# EAGLE board Iridium_9603_Beacon (EAGLE 7.6.0)
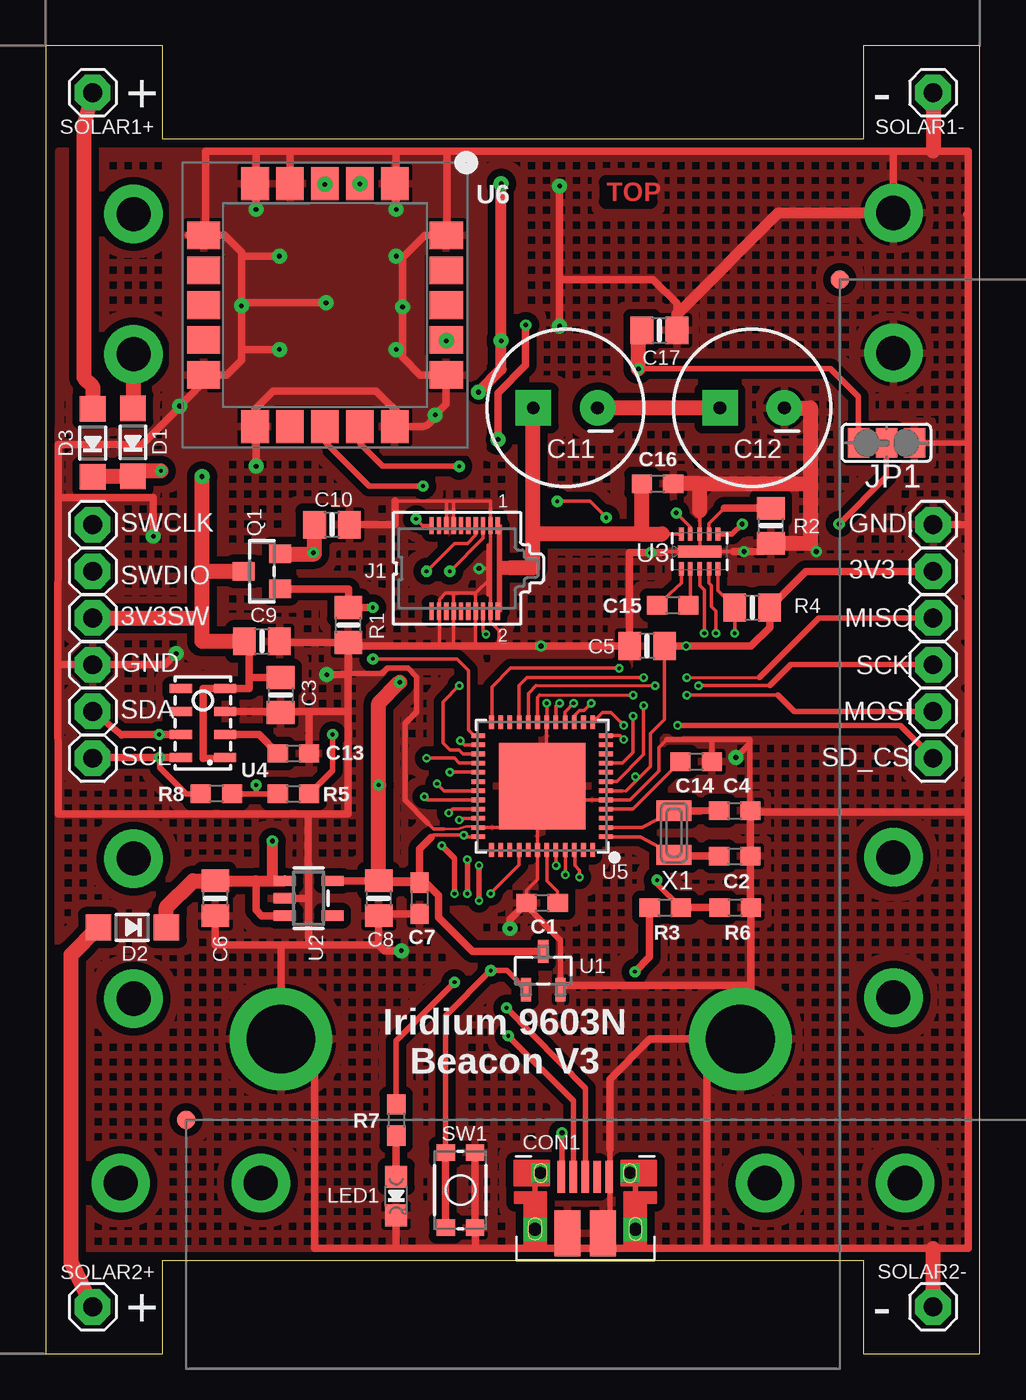
[diagram p0: board, top side]
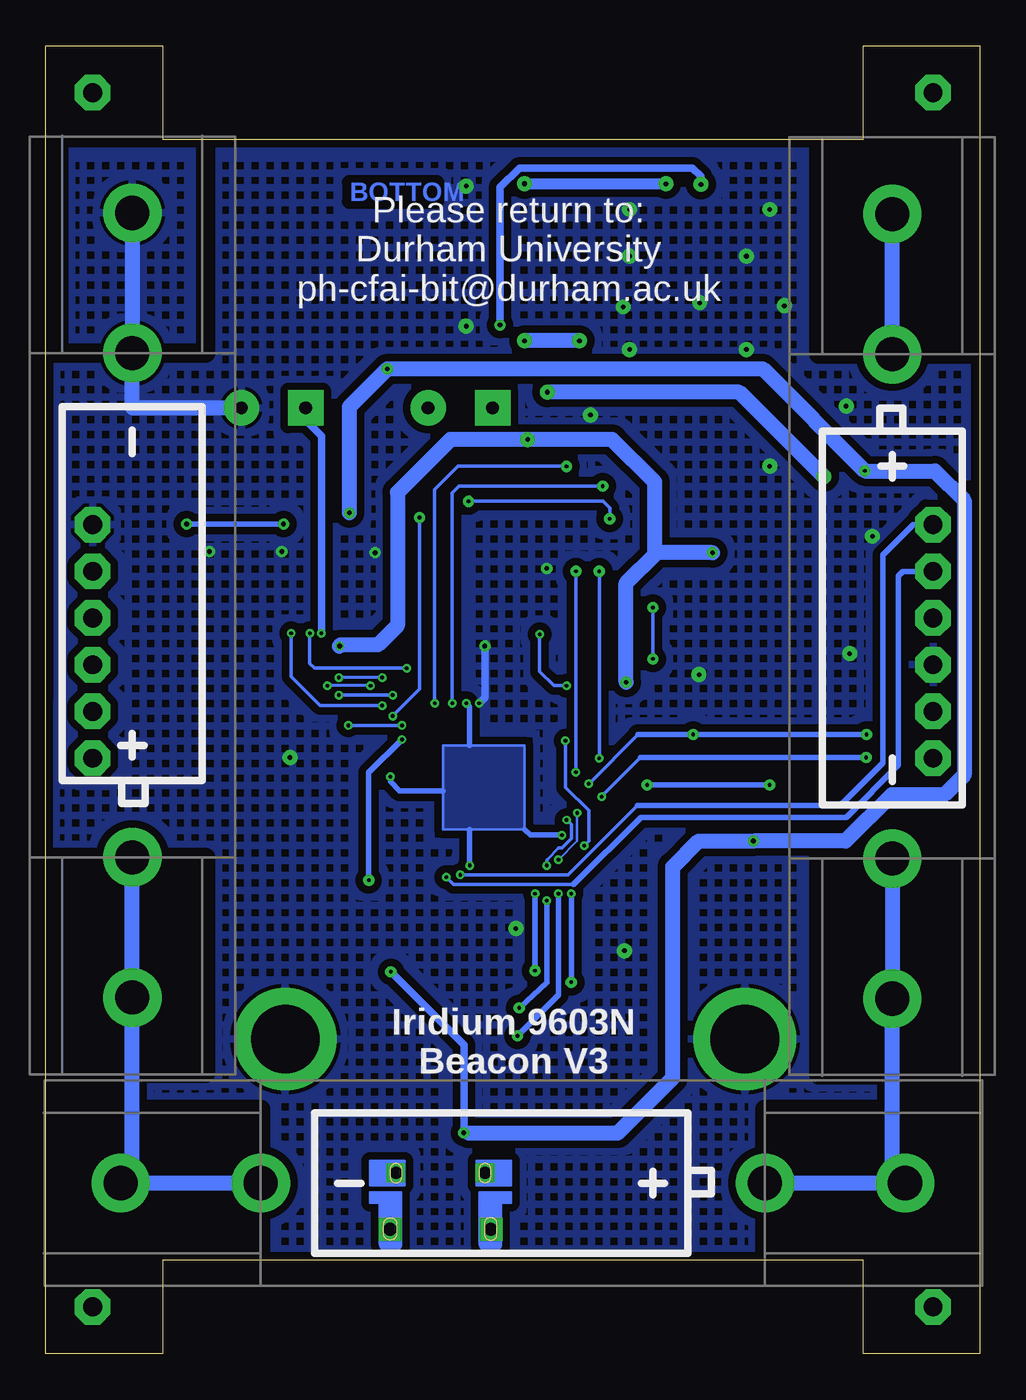
[diagram p1: board, bottom side, seen from below]

Size 50.8 x 71.12 mm. Coordinates in mm from the lower left corner, seen from the top.
Outline: 0,0 6.35,0 6.35,5.08 44.45,5.08 44.45,0 50.8,0 50.8,71.12 44.45,71.12 44.45,66.04 6.35,66.04 6.35,71.12 0,71.12 0,0
Copper layers (1*16): Top 0.018mm / dielectric 1.55mm / Bottom 0.018mm
Design rules "Multi-CB_2L_125um-Tracks_OL35um": minimum track width 0.125mm, minimum drill 0.2mm, track to track 0.125mm, track to pad 0.125mm, pad to pad 0.125mm, via to via 0.125mm, smd to smd 0mil, copper to edge 0.2mm, drill to drill 0.2mm, minimum pad ring 0.125mm, minimum via ring 0.125mm, stop-mask expansion 2mil, vias tented up to drill 0.45mm, thermal gap 0.2mm

## Footprints (pad centres in the part's own frame; a part is rotated, then mirrored left to right if it is on the bottom)
1X01 = drill 1.016 pad 1.93 octagon: 1 0,0
BATTERY-AAA-KEYSTONE82 = drill 1.854 pad 3.175: GND@1 21.336,0; GND@2 13.716,0; PWR@1 -21.336,0; PWR@2 -13.716,0
0603-NO = smd 1.1 x 1: 1 -0.85,0; 2 0.85,0
0805-NO = smd 1.24 x 1.5: 1 -0.95,0; 2 0.95,0
CPOL-RADIAL-1F-2.7V = drill 0.7 pad 1.93 square: + 1.75,0 | drill 0.7 pad 1.93: - -1.75,0
FCI_10103594 = smd 1.425 x 2.5: BASE@1 -0.963,1.45; BASE@2 0.963,1.45 | smd 0.4 x 1.75: D+ 0,4.525; D- -0.65,4.525; GND 1.3,4.525; ID 0.65,4.525; VBUS -1.3,4.525 | drill 0.7 pad 1.25 square: SPRT@1 -2.736,1.679; SPRT@2 2.736,1.679 | drill 0.65 pad 1.016 square: SPRT@3 -2.426,4.747; SPRT@4 2.426,4.747
SOD-123 = smd 1.4 x 1.4: A 1.85,0; C -1.85,0
FIDUCIAL-1X2 = smd 1 x 1: 1 0,0
SS4-10-3.50-X-D = smd 0.23 x 0.93: 1 1.8,2.335; 2 1.8,-2.335; 3 1.4,2.335; 4 1.4,-2.335; 5 1,2.335; 6 1,-2.335; 7 0.6,2.335; 8 0.6,-2.335; 9 0.2,2.335; 10 0.2,-2.335; 11 -0.2,2.335; 12 -0.2,-2.335; 13 -0.6,2.335; 14 -0.6,-2.335; 15 -1,2.335; 16 -1,-2.335; 17 -1.4,2.335; 18 -1.4,-2.335; 19 -1.8,2.335; 20 -1.8,-2.335
PAD-JUMPER-3-2OF3_NC_BY_TRACE_YES_SILK_LARGE = smd 1.168 x 1.6: 1 -1.524,0; 2 0,0; 3 1.524,0
CHIPLED_0805_NOOUTLINE = smd 1.2 x 1.2: A 0,-1.05; C 0,1.05
SOT23-WIDE = smd 1 x 1.2: 1 -0.95,-1; 2 0.95,-1; 3 0,1
STANDOFF-ELECTRICAL-MCMASTER-95117A411 = drill 3.734 pad 5.588: P1 0,0
TACTILE_SWITCH_SMD_4.6X2.8MM = smd 0.9 x 1: 1 -2.05,-0.8; 2 2.05,-0.8; 3 2.05,0.8; 4 -2.05,0.8
SOT95P237X112-3N = smd 0.559 x 1.27: 1 -0.94,-1.041; 2 0.94,-1.041; 3 0,1.041
SOT23-5 = smd 0.55 x 1.2: 1 -0.95,-1.3; 2 0,-1.3; 3 0.95,-1.3; 4 0.95,1.3; 5 -0.95,1.3
DFN300X200-10L = smd 0.711 x 0.254: 1 -0.94,0.991; 2 -0.94,0.508; 3 -0.94,0; 4 -0.94,-0.508; 5 -0.94,-0.991; 6 0.94,-0.991; 7 0.94,-0.508; 8 0.94,0; 9 0.94,0.508; 10 0.94,0.991 | smd 0.635 x 2.388: 11 0,0
LGA8 = smd 1.2 x 0.5: 1 -1.2,1.875; 2 -1.2,0.625; 3 -1.2,-0.625; 4 -1.2,-1.875; 5 1.2,-1.875; 6 1.2,-0.625; 7 1.2,0.625; 8 1.2,1.875
TQFN48_7MM = smd 0.25 x 0.75: 1 -2.75,-3.475; 2 -2.25,-3.475; 3 -1.75,-3.475; 4 -1.25,-3.475; 5 -0.75,-3.475; 6 -0.25,-3.475; 7 0.25,-3.475; 8 0.75,-3.475; 9 1.25,-3.475; 10 1.75,-3.475; 11 2.25,-3.475; 12 2.75,-3.475; 25 2.75,3.475; 26 2.25,3.475; 27 1.75,3.475; 28 1.25,3.475; 29 0.75,3.475; 30 0.25,3.475; 31 -0.25,3.475; 32 -0.75,3.475; 33 -1.25,3.475; 34 -1.75,3.475; 35 -2.25,3.475; 36 -2.75,3.475 | smd 0.75 x 0.25: 13 3.475,-2.75; 14 3.475,-2.25; 15 3.475,-1.75; 16 3.475,-1.25; 17 3.475,-0.75; 18 3.475,-0.25; 19 3.475,0.25; 20 3.475,0.75; 21 3.475,1.25; 22 3.475,1.75; 23 3.475,2.25; 24 3.475,2.75; 37 -3.475,2.75; 38 -3.475,2.25; 39 -3.475,1.75; 40 -3.475,1.25; 41 -3.475,0.75; 42 -3.475,0.25; 43 -3.475,-0.25; 44 -3.475,-0.75; 45 -3.475,-1.25; 46 -3.475,-1.75; 47 -3.475,-2.25; 48 -3.475,-2.75 | smd 4.7 x 4.7: THERMAL 0,0
SAM-M8Q = smd 1.8 x 1.5: 1 -6.6,3.8; 2 -6.6,1.9; 3 -6.6,0; 4 -6.6,-1.9; 5 -6.6,-3.8; 11 6.6,-3.8; 12 6.6,-1.9; 13 6.6,0; 14 6.6,1.9; 15 6.6,3.8 | smd 1.5 x 1.8: 6 -3.8,-6.6; 7 -1.9,-6.6; 8 0,-6.6; 9 1.9,-6.6; 10 3.8,-6.6; 16 3.8,6.6; 17 1.9,6.6; 18 0,6.6; 19 -1.9,6.6; 20 -3.8,6.6
XTAL3215 = smd 1.1 x 1.9: P$1 1.2,0; P$2 -1.2,0

## Placement (x,y rotation side)
3V3  [1X01]  48.26,42.55 0 top
3V3SW  [1X01]  2.54,40.01 0 top
BAT1  [BATTERY-AAA-KEYSTONE82]  4.76,40.64 270 bottom
BAT2  [BATTERY-AAA-KEYSTONE82]  25.4,9.27 180 bottom
BAT3  [BATTERY-AAA-KEYSTONE82]  46.1,40.7 90 bottom
C1  1uF  [0603-NO]  26.99,24.51 180 top
C2  22pF  [0603-NO]  37.47,27.05 0 top
C3  10uF  [0805-NO]  12.76,35.81 270 top
C4  22pF  [0603-NO]  37.47,29.53 0 top
C5  10uF  [0805-NO]  32.7,38.48 180 top
C6  10µF  [0805-NO]  9.21,24.77 270 top
C7  1uF  [0603-NO]  20.32,24.77 270 top
C8  10µF  [0805-NO]  18.1,24.77 270 top
C9  0.1uF  [0805-NO]  11.75,38.73 0 top
C10  10uF  [0805-NO]  15.56,45.09 0 top
C11  1F 2.7V  [CPOL-RADIAL-1F-2.7V]  28.26,51.44 180 top
C12  1F 2.7V  [CPOL-RADIAL-1F-2.7V]  38.42,51.44 180 top
C13  0.1uF  [0603-NO]  13.46,32.64 0 top
C14  1uF  [0603-NO]  35.37,32.19 0 top
C15  1uF  [0603-NO]  34.1,40.7 0 top
C16  0.22uF  [0603-NO]  33.27,47.31 0 top
C17  2.2uF  [0805-NO]  33.37,55.66 0 top
CON1  [FCI_10103594]  29.34,5.08 0 top
D1  MBR120  [SOD-123]  4.73,49.56 90 top
D2  MBR120  [SOD-123]  4.7,23.18 180 top
D3  MBR120  [SOD-123]  2.54,49.53 90 top
FD1  FIDUCIAL1X2  [FIDUCIAL-1X2]  7.62,12.7 0 top
FD2  FIDUCIAL1X2  [FIDUCIAL-1X2]  43.18,58.42 0 top
GND  [1X01]  2.54,37.47 0 top
GND.  [1X01]  48.26,45.09 0 top
J1  SS4-10-3.50-X-D  [SS4-10-3.50-X-D]  22.78,42.71 0 top
JP1  [PAD-JUMPER-3-2OF3_NC_BY_TRACE_YES_SILK_LARGE]  45.72,49.53 180 top
LED1  RED  [CHIPLED_0805_NOOUTLINE]  19.05,8.57 180 top
MISO  [1X01]  48.26,40.01 0 top
MOSI  [1X01]  48.26,34.92 0 top
Q1  DMG3415U-7  [SOT23-WIDE]  11.75,42.55 90 top
R1  100K  [0805-NO]  16.45,39.62 90 top
R2  30K  [0805-NO]  39.43,45.02 90 top
R3  100k  [0603-NO]  33.69,24.26 0 top
R4  100K  [0805-NO]  38.42,40.58 0 top
R5  1K  [0603-NO]  13.46,30.45 0 top
R6  100K  [0603-NO]  37.5,24.26 0 top
R7  2.2K  [0603-NO]  19.05,12.7 270 top
R8  1K  [0603-NO]  9.27,30.45 180 top
S1  STANDOFF_ELECTRICALMCMASTER-95117A411  [STANDOFF-ELECTRICAL-MCMASTER-95117A411]  12.78,17.1 0 top
S2  STANDOFF_ELECTRICALMCMASTER-95117A411  [STANDOFF-ELECTRICAL-MCMASTER-95117A411]  37.78,17.1 0 top
SCK  [1X01]  48.26,37.47 0 top
SCL  [1X01]  2.54,32.38 0 top
SD_CS  [1X01]  48.26,32.38 0 top
SDA  [1X01]  2.54,34.92 0 top
SOLAR1+  [1X01]  2.54,68.58 0 top
SOLAR1-  [1X01]  48.26,68.58 0 top
SOLAR2+  [1X01]  2.54,2.54 0 top
SOLAR2-  [1X01]  48.26,2.54 0 top
SW1  [TACTILE_SWITCH_SMD_4.6X2.8MM]  22.54,8.89 270 top
SWCLK  [1X01]  2.54,45.09 0 top
SWDIO  [1X01]  2.54,42.55 0 top
U1  MCP111T-195I/TT  [SOT95P237X112-3N]  27.05,20.83 0 top
U2  SPX3819-3.3  [SOT23-5]  14.29,24.77 270 top
U3  LTC3225EDDB#TRMPBF  [DFN300X200-10L]  35.56,43.62 90 top
U4  MPL3115A2LGA8  [LGA8]  8.54,34.29 180 top
U5  ATSAMD21G18_QFN  [TQFN48_7MM]  26.99,30.86 90 top
U6  SAM-M8Q  [SAM-M8Q]  15.18,57.02 270 top
X1  32.768  [XTAL3215]  34.16,28.32 270 top

## Library data of the parts
3V3 3V3SW GND GND. MISO MOSI SCK SCL SD_CS SDA SOLAR1+ SOLAR1- SOLAR2+ SOLAR2- SWCLK SWDIO = adafruit
BAT1-BAT3 S1 S2 = SparkFun-Electromechanical
C1-C10 C13-C17 CON1 D1-D3 LED1 Q1 R1-R8 U2 U5 = microbuilder
C11 C12 = SparkFun-Capacitors
FD1 FD2 = SparkFun-Aesthetics
J1 = SS4-10-3.50-X-D
JP1 = SparkFun-Passives
SW1 = SparkFun-Electromechanical; PROD_ID: SWCH-13065
U1 = Microchip-MCP11; MPN: MCP111T-270E/TT; OC_FARNELL: 1851877; OC_NEWARK: 56J7328; PACKAGE: SOT23-3; SUPPLIER: MICROCHIP
U3 = LTC_By_element14_Batch_1
U4 = SparkFun-Sensors
U6 = ubloxLib
X1 = adafruit2

## Nets
3V3SW: 3V3SW.1 C3.1 C9.1 Q1.3 U4.1 U4.4 U6.2 U6.17
!RESET: SW1.1 SW1.2 U1.1 U5.40
+3V3: 3V3.1 C5.1 C7.1 C8.1 C10.1 Q1.2 R4.2 R5.1 R8.1 U1.3 U2.5 U5.6 U5.17 U5.36 U5.44 U6.3
A0: U5.3
A1: R4.1 U3.5 U5.7
A2: U5.8
A3: J1.19 U5.9
A4: U5.10
A5: U5.47
AREF: C14.1 U5.4
D0: U5.16 U6.13
D1: U5.15 U6.14
D2: U5.23
D3: U5.14
D5: U3.4 U5.24
D6: J1.5 U5.29
D7: U5.30
D8: U5.11
D9: R3.2 R6.1 U5.12
D10: J1.6 U5.27
D11: Q1.1 R1.2 U5.25
D12: J1.7 U5.28
D13: R7.1 U5.26
D+: CON1.D+ U5.34
D-: CON1.D- U5.33
GND: BAT3.GND@1 BAT3.GND@2 C1.2 C2.2 C3.2 C4.2 C5.2 C6.2 C7.2 C8.2 C9.2 C10.2 C12.- C13.2 C14.2 C16.2 C17.2 CON1.BASE@1 CON1.BASE@2 CON1.GND CON1.SPRT@1 CON1.SPRT@2 CON1.SPRT@3 CON1.SPRT@4 GND.1 GND..1 J1.3 J1.4 J1.8 J1.13 J1.14 J1.15 J1.18 JP1.1 LED1.C R1.1 R2.1 R6.2 S1.P1 S2.P1 SOLAR1-.1 SOLAR2-.1 SW1.3 SW1.4 U1.2 U2.2 U3.8 U3.11 U4.3 U5.5 U5.18 U5.35 U5.42 U5.THERMAL U6.1 U6.4 U6.5 U6.6 U6.10 U6.11 U6.15 U6.16 U6.20
LTC3225_VOUT: C11.+ C16.1 J1.1 J1.2 U3.10
MISO: MISO.1 U5.21
MOSI: MOSI.1 U5.19
N$1: BAT2.GND@1 BAT2.GND@2 BAT3.PWR@1 BAT3.PWR@2
N$2: LED1.A R7.2
N$3: BAT1.GND@1 BAT1.GND@2 BAT2.PWR@1 BAT2.PWR@2
N$4: D3.A SOLAR1+.1
N$5: C2.1 U5.1 X1.P$1
N$6: C11.- C12.+ U3.3
N$7: C4.1 U5.2 X1.P$2
N$9: C15.2 U3.2
N$10: C15.1 U3.1
N$11: R2.2 U3.7
N$12: C13.1 U4.2
N$13: JP1.2 U3.6
N$14: D2.A SOLAR2+.1
SCK: SCK.1 U5.20
SCL: R8.2 SCL.1 U4.8 U5.32
SD_CS: SD_CS.1 U5.13
SDA: R5.2 SDA.1 U4.7 U5.31
SWCLK: SWCLK.1 U5.45
SWDIO: SWDIO.1 U5.46
VBAT: BAT1.PWR@1 BAT1.PWR@2 D1.A
VBUS: C6.1 C17.1 CON1.VBUS D1.C D2.C D3.C JP1.3 R3.1 U2.1 U2.3 U3.9
VDDCORE1: C1.1 U5.43

## Tracks (layer width: path | path; a pad name or v marks a point on that pad's centre or on a via)
3V3SW  (via drill 0.25 pad 0.81)
  Top 0.406: U4.1 8.54,32.35 8.54,36.16 U4.4 11.04,36.16 11.04,36.76 | C9.1 11.04,38.73 11.04,36.76 | C3.1 11.04,36.76
  Top 0.61: v23.53,52.29 24.77,53.53 v24.77,55.09 v24.77,63.63
  Top 0.813: C9.1 8.49,38.73 8.49,40.01 | 8.49,40.01 8.49,42.55 | Q1.3 8.49,42.55 | 3V3SW.1 8.49,40.01 | 8.49,42.55 v8.49,47.7 | U6.2 17.05,63.6 | v21.78,55.09 U6.17
  Bottom 0.61: v24.76,63.62 U6.2
  Bottom 0.813: v8.49,47.7 13.08,52.29 v23.53,52.29 | v24.77,63.63 v24.76,63.62 | v21.78,55.09 v24.77,55.09
  other vias: 17.08,63.62
!RESET  (via drill 0.2 pad 0.46, 0.2 pad 0.61)
  Top 0.203: U5.40 25.74,26.56 v24.19,25.02
  Top 0.305: SW1.1 21.74,18.38 v24.19,20.83 25.07,20.83 U1.1
  Top 0.406: SW1.1 SW1.2
  Bottom 0.305: v24.19,20.83 v24.19,25.02
+3V3  (via drill 0.2 pad 0.41, 0.2 pad 0.46, 0.2 pad 0.61, 0.25 pad 0.41, 0.25 pad 0.61, 0.25 pad 0.81)
  Top 0.127: U5.6 31.56,30.61 | U5.36 23.47,28.07 | U5.44 27.75,27.37 | 20.95,28.07 21.08,28.19
  Top 0.203: 32.07,31.11 32.89,31.94 32.89,33.72 33.66,34.48 C5.1 | U5.6 31.37,30.61 | v32.07,31.37 32.07,31.11 | 32.07,31.11 31.56,30.61 | U5.17 27.74,35.23 v27.94,35.37 | 27.75,27.37 v27.75,26.54 | 21.08,28.19 v22.73,28.19 22.82,28.11 U5.36
  Top 0.305: R5.1 R8.1 11.43,30.45 v11.43,30.92
  Top 0.406: 20.95,28.07 20.32,27.43 C7.1 18.1,25.61 C8.1 U2.5 20.58,25.71 21.37,24.92 21.37,23.72 23.22,21.87 U1.3 | 3V3.1 41.34,42.55 R4.2 39.37,39.49 38.35,38.48 v34.83,38.48 | 34.77,38.48 C5.1 | v24.59,49.72 24.59,52.25 26.1,53.75 v26.1,55.94 | v15.18,63.59 U6.3
  Top 0.813: Q1.2 14.61,43.49 | 14.61,43.49 C10.1 | C8.1 v18.1,30.92 18.1,35.37 v19.24,36.51 | 14.61,43.49 v14.54,43.56
  Bottom 0.127: 27.74,33.08 24.77,33.08 24.77,28.51 27.75,28.51 29.21,28.51 29.21,30.61 29.21,33.08 27.75,33.08 27.74,33.08 | 27.74,33.08 U5.17
  Bottom 0.305: 29.21,30.61 31.56,30.61 32.07,31.11 v32.07,31.37 | v27.75,26.54 27.75,28.51 | 24.77,28.51 24.45,28.19 v22.73,28.19 | v27.94,35.37 27.75,35.18 27.75,33.08 | v11.43,30.92 v18.1,30.92
  Bottom 0.406: v26.1,55.94 26.1,63.44 25.05,64.48 15.62,64.48 15.18,64.04 v15.18,63.59
  Bottom 0.813: v19.24,36.51 19.24,41.91 17.65,43.5 | v14.54,43.56 17.59,43.56 17.65,43.5 | 17.65,43.5 17.68,43.53 17.68,47.4 20,49.72 v24.59,49.72 28.8,49.72 31.69,46.83 31.69,39.59 32.73,38.54 34.77,38.54 v34.83,38.48
  pour Bottom: 24.77,33.08 29.21,33.08 29.21,28.51 24.77,28.51
A1  (via drill 0.2 pad 0.46)
  Top 0.127: R4.1
  Top 0.203: U3.5 36.55,41.49 R4.1 | U5.7 31.05,31.11 32.51,32.58 v32.51,35.24 | v37.47,39.18 R4.1
  Bottom 0.203: v32.51,35.24 35.88,35.24 37.47,36.83 v37.47,39.18
A3  (via drill 0.2 pad 0.46, 0.2 pad 0.61)
  Top 0.127: 30.48,32.13 U5.9
  Top 0.203: J1.19 20.49,45.04 v20.13,45.4 | v27.81,46.35 29.59,46.35 v30.48,45.47 | 30.48,32.13 31.37,32.13 31.94,32.7 v31.94,34.67
  Bottom 0.203: v20.13,45.4 20.13,45.97 20.51,46.35 v27.81,46.35 | v30.48,45.47 30.48,36.13 v31.94,34.67
AREF
  Top 0.203: U5.4 31.94,29.61 C14.1
D0  (via drill 0.2 pad 0.46, 0.2 pad 0.61)
  Top 0.203: v28.7,35.37 28.24,34.91 U5.16
  Top 0.305: v20.51,47.18 17.59,47.18 15.24,49.53 15.24,50.36 U6.13
  Bottom 0.203: v28.7,35.37 28.7,46.8 28.32,47.18 v20.51,47.18
D1  (via drill 0.2 pad 0.46, 0.2 pad 0.61)
  Top 0.127: 28.74,34.71 U5.15
  Top 0.203: v29.65,35.37 29.27,34.99 29.02,34.99 28.74,34.71
  Top 0.305: v22.48,48.26 18.32,48.26 17.08,49.5 U6.14
  Bottom 0.203: v29.65,35.37 29.65,46.99 28.38,48.26 v22.48,48.26
D5  (via drill 0.2 pad 0.46)
  Top 0.127: 24.26,34.35 U5.24
  Top 0.203: U3.4 36.07,41.91 36.2,41.78 36.2,40.64 36.45,40.39 v36.45,39.18 | 24.26,34.35 24.26,36.26 25.27,37.27 v31.18,37.27
  Bottom 0.203: v36.45,39.18 36.45,37.53 36.2,37.27 v31.18,37.27
D6  (via drill 0.2 pad 0.46, 0.2 pad 0.61)
  Top 0.127: 23.5,31.62 U5.29
  Top 0.203: J1.5 23.78,44.35 v21.97,42.55 | v21.97,31.62 23.5,31.62
  Bottom 0.203: v21.97,42.55 v21.97,31.62
D9  (via drill 0.2 pad 0.46, 0.2 pad 0.61)
  Top 0.203: U5.12 31.22,33.61 v31.43,33.4
  Top 0.305: R3.2 33.24,25.55 v33.24,25.75
  Top 0.406: R3.2 R6.1
  Bottom 0.305: v33.24,25.75 33.24,31.59 v31.43,33.4
D10  (via drill 0.2 pad 0.46)
  Top 0.127: 22.35,36.2 v22.48,36.32
  Top 0.203: U5.27 22.7,32.61 22.48,32.83 21.97,32.83 21.59,33.21 21.59,35.43 v22.48,36.32 | J1.6 23.78,39.28 v23.94,39.12
  Bottom 0.203: v22.48,36.32 23.18,36.32 23.94,37.08 v23.94,39.12
D11  (via drill 0.2 pad 0.61)
  Top 0.127: U5.25 23.29,33.61
  Top 0.203: 23.29,33.61 22.99,33.91 22.99,37.15 22.35,37.78 v17.78,37.78
  Top 0.406: Q1.1 16.45,41.59 R1.2 | R1.2 v17.78,40.58 | R1.2
  Bottom 0.203: v17.78,37.78 v17.78,40.58
D12  (via drill 0.2 pad 0.46, 0.2 pad 0.61)
  Top 0.127: 23.49,32.13 U5.28
  Top 0.203: v20.7,42.55 22.23,44.07 22.92,44.07 23.38,44.52 J1.7 | v20.7,32.38 22.23,32.38 22.48,32.13 23.49,32.13
  Bottom 0.203: v20.7,42.55 v20.7,32.38
D13  (via drill 0.2 pad 0.46, 0.2 pad 0.61)
  Top 0.203: v22.54,33.34 22.77,33.11 U5.26
  Top 0.305: v22.23,25.02 22.23,26.92 v21.53,27.62 | R7.1 19.05,17.02 v22.23,20.19
  Bottom 0.203: v22.54,33.34 22.54,30.8 21.27,29.53 21.27,27.88 v21.53,27.62
  Bottom 0.305: v22.23,20.19 v22.23,25.02
D+  (via drill 0.2 pad 0.46, 0.2 pad 0.61)
  Top 0.203: U5.34 22.57,29.11 v22.48,29.02
  Top 0.305: v23.56,26.54 v23.56,24.64 | CON1.D+ 29.34,14.41 v25.05,18.8
  Bottom 0.152: 22.92,27.5 23.56,26.86
  Bottom 0.203: v22.48,29.02 22.23,28.77 22.23,28 22.73,27.5 22.92,27.5 | 23.56,26.86 v23.56,26.54
  Bottom 0.305: v25.05,18.8 23.56,20.19 v23.56,24.64
D-  (via drill 0.2 pad 0.46, 0.2 pad 0.61)
  Top 0.203: U5.33 22.12,29.61 v21.91,29.4
  Top 0.305: v22.92,26.86 v22.92,25.02 | CON1.D- 28.69,13.73 v25.15,17.27
  Bottom 0.127: v21.91,29.4 21.91,27.88 v22.92,26.86
  Bottom 0.305: v22.92,25.02 22.92,19.49 v25.15,17.27
GND  (via drill 0.2 pad 0.46, 0.25 pad 0.61, 0.25 pad 0.81)
  Top 0.127: U5.THERMAL 24.74,28.61 | U5.THERMAL 26.74,30.61 | U5.THERMAL 27.74,30.11 | U5.THERMAL 27.24,31.11 | J1.4 24.19,40.37 | U5.18 | R1.1 17.02,38.67 16.38,38.48 | 12.7,38.67 C9.2 | U5.42 | C4.2 38.29,29.53 | J1.15 | J1.18 21.4,40.37 | J1.8 23.37,40.37 | 33.66,43.62 33.66,43.56 | 21.65,28.54 22.42,28.54 22.86,28.67 23.45,28.67 U5.35
  Top 0.203: 24.74,28.61 U5.35 | 26.74,30.61 U5.42 | 27.74,30.11 U5.5 31.76,30.11 33.34,31.69 33.34,32.96 33.78,33.4 | 27.24,31.11 U5.18 | 24.18,42.16 J1.4 24.18,42.7 v23.56,42.7 | 24.18,42.16 J1.3 24.19,45.04 | C1.2 26.14,25.18 26.73,25.78 U5.42 | J1.15 21.78,46.35 | 21.78,46.35 18.99,46.35 | 24.19,45.04 24.19,46.35 22.1,46.35 | 22.1,46.35 21.78,46.35 | 21.4,38.48 21.4,40.37 21.4,41.02 21.74,41.36 23.38,41.36 | U3.11 U3.8 35.56,45.85 | U3.11 37.4,43.62 | U3.11 33.66,43.62 | J1.8 23.38,41.36 | 23.38,41.36 24.18,42.16 | U5.18 v27.24,35.37 | 23.37,40.37 23.37,38.48 23.37,38.42 | 22.16,38.48 22.16,40.35 J1.14 22.16,40.39 22.16,41.34 | J1.13 22.18,46.27 22.1,46.35 | 21.65,28.54 21.08,28.54 20.77,28.86 | 24.19,45.04 24.19,43.97 24.04,43.97 24.04,41.24 24.19,41.24 24.19,39.78 24.64,39.34 24.64,38.54 24.67,38.51
  Top 0.305: 36.22,33.4 C14.2 | 38.29,29.53 38.29,33.18 | 36.22,33.4 38.29,33.4 38.29,33.18 | 33.78,33.4 36.22,33.4 | 30.67,11.11 30.67,9.64 CON1.GND 30.67,9.61 30.67,7.18 30.3,7.18 CON1.BASE@2 | CON1.SPRT@3 26.6,9.83 CON1.SPRT@1 26.67,6.76 26.67,5.71 | CON1.SPRT@4 32.07,9.83 CON1.SPRT@2 31.75,6.76 31.75,5.71 | 20.77,28.86 19.53,30.1 19.53,34.26 20.16,34.89 20.16,36.8 19.68,37.27 18.57,37.27 18.29,36.99 16.45,36.99 16.51,37.05 16.51,38.54 | 26.05,24.42 27.99,22.48 U1.2 | JP1.1 50.16,49.53 | 38.29,33.18 v37.53,32.42
  Top 0.406: 11.43,65.41 8.7,65.41 8.7,60.82 U6.6 | 11.43,65.41 13.27,65.41 | 13.27,65.41 19.05,65.41 | 19.05,65.41 21.81,65.41 | 21.81,65.41 46.1,65.41 | 46.1,65.41 48.26,65.41 50.16,65.41 50.16,62.04 | 50.16,62.04 50.16,49.53 50.16,45.09 | 50.16,45.09 50.16,29.46 | 50.16,29.46 50.16,5.71 48.26,5.71 35.94,5.71 | 0.66,46.55 0.67,49.44 5.24,49.44 7.3,51.5 | 0.66,46.55 0.64,37.47 | 0.64,37.47 0.67,29.34 14.26,29.34 | 19.05,5.71 14.61,5.71 14.61,17.1 S1.P1 12.78,22.23 | 19.05,5.71 23.37,5.71 | 23.37,5.71 26.67,5.71 31.75,5.71 35.94,5.71 | LED1.C 19.05,5.71 | S2.P1 32.85,17.1 30.67,14.92 30.67,11.11 | U2.2 14.29,24.77 | 14.29,24.77 14.29,22.23 | 14.29,22.23 12.78,22.23 | 12.78,22.23 9.21,22.23 C6.2 | C7.2 18.1,23.91 C8.2 18.1,22.23 | 18.1,22.23 14.29,22.23 | GND..1 50.16,45.09 | 0.64,37.47 GND.1 6.48,37.47 v7.08,38.07 | 16.38,38.48 21.4,38.48 22.16,38.48 23.37,38.48 v26.92,38.48 | 12.7,38.67 R1.1 16.45,36.99 | C9.2 12.76,38.73 | C10.2 18.99,45.09 18.99,46.35 | C5.2 v26.92,38.48 | C5.2 v26.92,38.48 | 37.4,43.62 v37.97,43.62 38.99,43.62 R2.1 | 33.66,43.56 v32.89,43.56 31.75,43.56 C5.2 | 50.1,61.98 50.16,62.04 | 26.05,24.42 C1.2 25.24,23.61 v25.24,23.11 | SW1.4 SW1.3 23.37,6.81 23.37,5.71 | S2.P1 35.94,17.1 35.94,5.71 | S2.P1 38.35,17.68 38.35,20.03 | 50.16,29.46 38.38,29.46 C4.2 C2.2 38.31,24.34 38.1,24.13 | 14.29,24.77 14.29,26.64 | 16.45,34.91 16.45,29.34 14.26,29.34 | 16.45,34.91 16.45,36.99 | v41.91,43.62 41.91,43.72 41.53,44.1 | U4.3 12.76,34.91 | 12.76,34.91 C3.2 | 12.76,34.91 14.31,34.91 | 14.31,34.91 C13.2 | 14.31,34.91 16.45,34.91 | BAT3.GND@1 46.1,65.41 | 38.35,20.03 R6.2 | 38.35,20.03 28.23,20.03 27.94,20.32 | 19.05,65.41 19.05,63.62 U6.1 19.05,63.55 v19.05,62.23
  Top 0.406: 11.43,65.41 11.43,63.62 U6.5 11.43,63.57 v11.43,62.23 | U6.4 13.27,65.41 | 10.64,54.61 10.64,54.04 9.82,53.22 U6.10 8.58,52.84 v7.27,51.53 | 10.64,54.61 v10.64,56.99 | v10.64,56.99 10.64,59.69 | 10.64,59.69 10.64,59.91 9.73,60.82 U6.6 | 21.81,65.41 21.81,60.86 U6.20 20.62,60.82 19.4,59.59 | U6.15 19.49,50.42 | 19.49,50.42 20.52,50.42 arc60 v21.18,51.05 21.78,51.65 U6.16 20.36,53.22 19.4,54.2 19.4,54.61 | 19.49,50.42 19.49,50.83 17.97,52.36 12.35,52.36 11.38,51.38 U6.11 11.43,50.37 v11.43,48.26 | 19.4,54.61 v19.4,56.93 19.4,59.59 | 8.64,23.81 8.89,24.07 8.89,24.13 | 14.26,29.34 14.26,26.54 | v19.34,21.91 18.41,21.91 18.1,22.23 | v15.27,36.92 16.38,36.92 16.45,36.99 | v5.84,44.45 5.84,46.55 0.66,46.55 | v27.94,63.5 27.94,58.42 | 27.94,58.42 v27.94,55.88 | C17.2 34.32,57.12 33.02,58.42 27.94,58.42 | U6.6 7.74,60.82 | v19.05,54.61 19.4,54.61 | v12.7,54.61 10.64,54.61 | v12.7,59.69 10.64,59.69 | v19.05,59.69 19.4,59.69 19.4,59.59 | v15.24,57.15 10.64,57.15 v10.64,56.99
  Top 0.61: BAT3.GND@1 39.85,62.04 34.32,56.51 C17.2
  Top 0.813: 35.56,45.85 35.56,47.31 | 35.56,47.31 C16.2 | C12.- 41.59,51.44 41.59,44.07 R2.1 | 35.56,47.31 41.53,47.31 | SOLAR1-.1 48.26,65.41 | SOLAR2-.1 48.26,5.71
  Bottom 0.406: v27.24,35.37 26.92,35.69 v26.92,38.48
  Bottom 0.813: C12.- 46.1,51.44 BAT3.GND@2 BAT3.GND@1
  pour Bottom (isolate 0.406, rank 2, hatched): 0.64,5.71 0.7,65.41 50.16,65.41 50.23,5.71
  pour Top (isolate 0.406, rank 2, hatched): 0.64,5.71 0.7,65.41 50.16,65.41 50.16,5.71
  pour Top (isolate 0.254): 6.89,65.37 23.78,65.37 23.78,49.02 6.89,49.02
LTC3225_VOUT
  Top 0.127: 24.58,42.74 J1.2 24.7,40.37 24.7,42.61 | 24.58,42.74 J1.1 24.77,45.04 24.77,43.05 | 25.27,42.74 24.58,42.74 | 24.7,42.61 24.7,42.95 | 24.7,42.95 24.7,45.02 24.57,45.02 | 24.77,42.42 24.77,40.39 24.64,40.39 | 24.77,42.86 25.08,42.86 | 24.77,42.86 24.77,43.05 | 24.77,43.05 25.27,43.05 | 24.7,42.95 25.08,42.95 25.08,42.93 | 24.77,42.86 24.77,42.42 | 24.77,42.42 25.34,42.42 | 24.89,42.61 25.15,42.61 | 24.7,42.61 24.89,42.61 | 24.89,42.61 24.89,42.48 | 33.53,44.58 33.54,44.56
  Top 0.203: 33.54,44.56 U3.10
  Top 0.813: C11.+ 26.48,51.44 26.48,44.56 | 26.48,44.56 26.48,42.74 25.27,42.74 | 32.42,44.56 C16.1 | 32.42,44.56 26.48,44.56 | 32.42,44.56 32.44,44.58 33.53,44.58
MISO  (via drill 0.2 pad 0.46)
  Top 0.152: v34.86,36.77 38.8,36.77
  Top 0.203: U5.21 25.74,36.34 26.16,36.77 v32.51,36.77
  Top 0.305: 38.8,36.77 42.04,40.01 MISO.1
  Bottom 0.152: v32.51,36.77 v34.86,36.77
MOSI  (via drill 0.2 pad 0.46)
  Top 0.127: U5.19
  Top 0.152: 26.86,35.81 v31.94,35.81
  Top 0.203: U5.19 26.73,35.69 26.86,35.81 | v34.86,35.81 39.81,35.81
  Top 0.305: 39.81,35.81 40.7,34.92 MOSI.1
  Bottom 0.203: v31.94,35.81 v34.86,35.81
N$1
  Bottom 0.813: BAT2.GND@2 BAT2.GND@1 46.1,9.27 BAT3.PWR@1 BAT3.PWR@2
N$2
  Top 0.406: R7.2 LED1.A
N$3
  Bottom 0.813: BAT2.PWR@1 4.76,9.27 | 4.76,9.27 BAT1.GND@1 BAT1.GND@2 | 4.76,9.27 BAT2.PWR@2
N$4
  Top 0.813: SOLAR1+.1 2.06,66.83 2.06,53.09 2.54,52.61 D3.A
N$5
  Top 0.203: U5.1 32.35,28.11 X1.P$1
  Top 0.406: X1.P$1 33.47,27.12 33.47,27.05 C2.1
N$6  (via drill 0.2 pad 0.46)
  Top 0.203: U3.3 35.56,41.78 35.81,41.53 v35.81,39.18
  Top 0.813: C12.+ C11.-
  Bottom 0.406: v35.81,39.18 35.81,49.91 36.67,50.76 C12.+
N$7
  Top 0.203: U5.2 32.43,28.61 X1.P$2
  Top 0.406: X1.P$2 35.6,29.52 C4.1
N$9
  Top 0.127: 35.05,40.73 C15.2
  Top 0.203: U3.2 35.05,40.73
N$10
  Top 0.203: U3.1 34.57,41.9 C15.1
N$11
  Top 0.203: U3.7 36.07,45.15 36.89,45.97
  Top 0.406: 36.89,45.97 R2.2
N$12
  Top 0.406: U4.2 11.59,33.66 C13.1
N$13  (via drill 0.25 pad 0.61)
  Top 0.305: U3.6 37.33,44.56 v37.88,45.12 | v43.15,45.12 45.72,47.69 JP1.2
  Bottom 0.305: v37.88,45.12 v43.15,45.12
N$14
  Top 0.813: SOLAR2+.1 1.36,4.99 1.36,21.69 D2.A
SCK  (via drill 0.2 pad 0.46)
  Top 0.152: 26.67,36.32 v33.15,36.32
  Top 0.203: U5.20 26.24,35.89 26.67,36.32 | v35.5,36.32 39.37,36.32
  Top 0.305: 39.37,36.32 40.51,37.47 SCK.1
  Bottom 0.152: v33.15,36.32 v35.5,36.32
SCL  (via drill 0.2 pad 0.46, 0.2 pad 0.61)
  Top 0.203: U5.32 20.75,30.11 v20.57,30.29
  Top 0.305: R8.2 7.62,30.45 6.19,31.88 v6.19,32.41
  Top 0.406: U4.8 v6.19,32.41 2.54,32.41 SCL.1
  Bottom 0.203: v20.57,30.29 18.45,32.41
  Bottom 0.305: 18.45,32.41 v6.19,32.41
SD_CS  (via drill 0.2 pad 0.46)
  Top 0.203: U5.13 30.26,34.86 30.73,34.86 v31.43,34.16
  Top 0.305: v34.35,34.16 46.48,34.16 SD_CS.1
  Bottom 0.203: v31.43,34.16 v34.35,34.16
SDA  (via drill 0.2 pad 0.46, 0.2 pad 0.61)
  Top 0.203: U5.31 21.65,30.61 v21.27,30.99
  Top 0.305: R5.2 15.59,31.73 v15.59,33.66
  Top 0.406: U4.7 v6.16,33.66 4.13,33.66 SDA.1
  Bottom 0.203: v21.27,30.99 18.6,33.66
  Bottom 0.305: 18.6,33.66 v15.59,33.66 v6.16,33.66
SWCLK  (via drill 0.2 pad 0.46)
  Top 0.127: 28.26,27.37 U5.45
  Top 0.203: v28.26,26.04 28.26,27.37
  Bottom 0.203: 18.64,29.81 22.42,26.04 v28.26,26.04
  Bottom 0.305: SWCLK.1 3.62,45.09 5.27,43.43 5.27,32.13 7.59,29.81 18.64,29.81
SWDIO  (via drill 0.2 pad 0.46)
  Top 0.127: 28.77,27.36 U5.46
  Top 0.203: v29.02,25.91 29.02,26.29 28.77,26.54 28.77,27.36
  Bottom 0.203: 22.1,25.53 28.64,25.53 v29.02,25.91
  Bottom 0.305: SWDIO.1 4.19,42.55 4.45,42.29 4.45,32 7.27,29.15 18.45,29.15 22.1,25.53
VBAT
  Top 0.813: D1.A 4.76,51.44 BAT1.PWR@2
  Bottom 0.813: BAT1.PWR@2 BAT1.PWR@1
VBUS  (via drill 0.2 pad 0.61, 0.25 pad 0.61)
  Top 0.203: U3.9 35.05,44.96 v34.29,45.72
  Top 0.305: CON1.VBUS 28.07,9.61 v28.07,12 | v32.23,53.56 42.67,53.56 44.2,52.04 JP1.3
  Top 0.406: 10.47,25.72 C6.1 | U2.1 12.32,25.71 | U2.3 11.74,23.82 11.43,24.13 11.43,25.71 | R3.1 32.84,21.57 v32.04,20.77
  Top 0.61: C6.1 11.43,25.71 U2.1 | 12.32,25.71 v12.32,27.88
  Top 0.813: v6.25,48.01 5.25,48.01 D1.C 2.57,47.71 D3.C | D2.C 6.55,24.27 8,25.71 C6.1 | v32.23,53.56 32.23,55.47 C17.1
  Bottom 0.406: v32.04,20.77 28.07,16.8 v28.07,12
  Bottom 0.61: v28.07,12 27.81,12 27.27,12
  Bottom 0.813: 27.81,12 19.68,12 16.7,14.99 16.7,26.48 15.3,27.88 v12.32,27.88 7.3,27.88 4.79,30.39 1.94,30.39 0.86,31.46 0.86,46.42 2.44,48.01 v6.25,48.01 11.81,53.56 v32.23,53.56 34.29,51.5 v34.29,45.72
VDDCORE1
  Top 0.127: U5.43
  Top 0.203: U5.43 27.24,25.72 27.84,25.12 C1.1

## Text on the board
Top: TOP
Bottom: BOTTOM
tPlace: + | - | U6 | Iridium 9603N / Beacon V3 | + | -
bPlace: Please return to: / Durham University / ph-cfai-bit@durham.ac.uk | Iridium 9603N / Beacon V3